# Altium PCB AudioAmplifierBasic.PcbDoc (part 2 of 2)
Units mm, origin at the board's own origin, x right, y up, seen from the top; angles counter-clockwise.
Board outline 125.22 x 154.05 mm, 2 copper layers (Top Layer, Bottom Layer); 45 components, 34 nets, 123 pads, 11 vias.
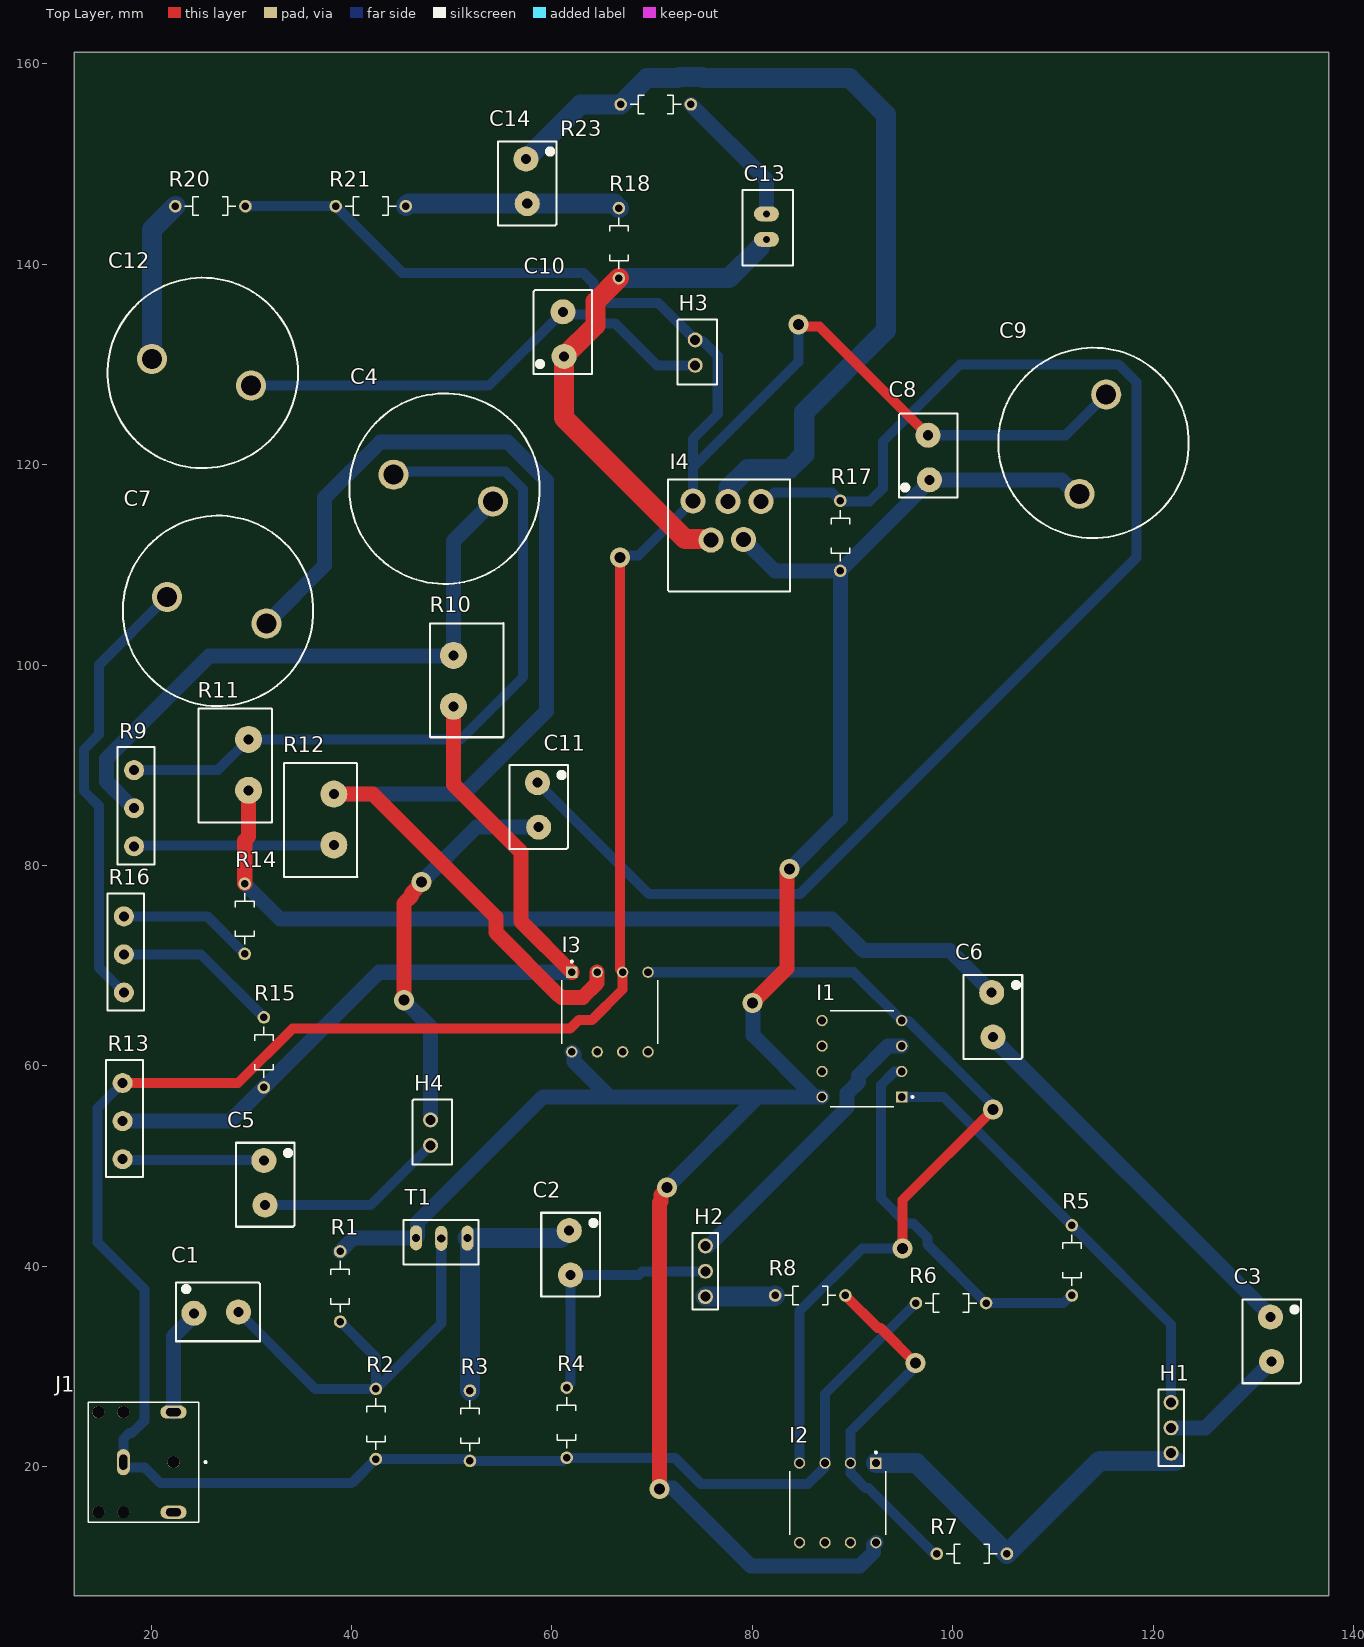
[diagram p0: Top Layer view]

## Part data (continued)
T1: library part SS49E-L, "Hall Effect Sensor, -65mT Min, 1-1.75V, Rectangular, Through Hole Mount", Manufacturer="Honeywell Sensing & Control", Max Operating Temperature=100°C, Max Supply Voltage=6.5V, Min Operating Temperature=-40°C, Min Supply Voltage=2.7V, Operating Current-Max=10mA, Package Shape/Style=Rectangular, Supplier Part Number=71J7825, Body Breadth=1.6mm, Body Height=4.1mm, Body Length or Diameter=4.1mm, Category=Sensors, ComponentLink1Description=https://datasheet.ciiva.com:443/pdfs/VipMasterIC/IC/HWSC/HWSC-S-A0000795678/HWSC-S-A0000795678-1.pdf?src-supplier=IHS+Markit, ComponentLink1URL=https://datasheet.ciiva.com:443/pdfs/VipMasterIC/IC/HWSC/HWSC-S-A0000795678/HWSC-S-A0000795678-1.pdf?src-supplier=IHS+Markit, ComponentLink2Description=https://datasheet.ciiva.com/15703/honeywell-sensing-ss39et-ss49e-ss59et-productsheet-15703324.pdf?src-supplier=Onlinecomponents.com, ComponentLink2URL=https://datasheet.ciiva.com/15703/honeywell-sensing-ss39et-ss49e-ss59et-productsheet-15703324.pdf?src-supplier=Onlinecomponents.com, Housing Material=Plastic, Linearity=-0.7%, Magnetic Field Range-Min=-65mT, Manufacturer Part Number=SS49E-L, Mounting Technology="Through Hole", Output Range=1-1.75V, Output Type="Analog Current", Pricing="1000=5.97 (USD)", RoHS=Yes, RoHS Compliant=Yes, Sensitivity=1.4mV/g, Sensor Type="MAGNETIC FIELD SENSOR,HALL EFFECT", Supplier=Newark, Termination=Solder

## Via types
v1: diameter 2, hole 1.1, Top Layer to Bottom Layer, 11 vias

## Nets (pads, with @x,y where several pads share a name; then routed paths per layer and width w, separated by ;. In a path a pad name is that pad's centre, name@x,y a point inside that pad or via, vN(x,y) a via of type N, cw(c..) or ccw(c..) an arc to the next point about the centre after c; other vN are vias at no path point)
+15: C8.2 C9.1 I1.8 I2.8 I3.8 I4.5 R1.2 R17.2 T1.1 | length 229.5
  Top Layer w1.5: v1(70.739,17.78) 70.739,46.355 70.866,46.482 70.866,47.109 71.501,47.744 v1(71.501,47.879) ; v1(80.01,66.294) 83.439,69.723 83.439,79.375 v1(83.693,79.629)
  Bottom Layer w1.5: R1.2 40.224,42.835 T1.1 46.585,42.985 46.585,44.398 59.082,56.896 65.748,56.896 ; I3.8 62.201,61.177 62.201,60.443 65.748,56.896 ; v1(70.739,17.78) 70.816,17.857 72.059,17.857 79.818,10.098 90.748,10.098 92.104,11.454 92.104,12.188 I2.8 ; v1(71.501,47.879) 80.518,56.896 ; I4.5 82.24,109.403 R17.2 ; v1(80.01,66.294) 80.08,66.224 80.08,63.044 86.228,56.896 I1.8 80.518,56.896 ; v1(83.693,79.629) 88.773,84.709 R17.2 ; C9.1 112.243,117.094 110.846,118.491 C8.2 97.663,118.293 R17.2 ; 65.748,56.896 80.518,56.896
-15: I1.4 I2.4 I3.4 | length 86
  Top Layer w1: v1(94.996,41.783) 94.996,46.609 v1(104.013,55.626)
  Bottom Layer w1: I3.4 90.076,69.342 I1.4 94.927,64.491 95.569,64.491 103.822,56.238 103.822,55.817 v1(104.013,55.626) ; I2.4 84.709,35.523 90.969,41.783 v1(94.996,41.783)
GND: C8.1 C9.2 H3.1 I2.3 I3.3 I4.3 J1.1 R2.1 R3.1 R4.1 R6.1 R13.1 R20.1 R21.1 | length 367
  Top Layer w1: R13.1 28.673,58.283 34.096,63.706 61.8,63.706 62.686,64.592 64.013,64.592 67.031,67.61 67.031,69.317 I3.3 67.056,69.377 66.802,69.631 v1(66.802,110.744) ; v1(84.582,133.985) 84.773,133.794 86.678,133.794 C8.1
  Bottom Layer w1: R13.1 14.645,55.783 14.645,42.388 19.325,37.708 19.325,24.577 18.095,23.347 17.811,23.347 17.225,22.761 J1.1 ; J1.1@17.225,20.035 17.367,19.893 19.379,19.893 20.925,18.347 40.008,18.347 R2.1 51.563,20.757 51.746,20.574 R3.1 61.088,20.574 61.398,20.884 R4.1 72.253,20.884 74.849,18.288 85.564,18.288 87.224,19.948 87.224,20.328 I2.3 87.249,27.249 R6.1 ; R20.1 R21.1 45.054,139.152 63.125,139.152 64.175,138.102 64.175,137.577 65.639,136.113 70.643,136.113 H3.1 74.391,132.365 75.033,132.365 76.545,130.853 76.545,125.052 74.073,122.581 74.073,119.752 ; v1(66.802,110.744) 66.993,110.935 68.635,110.935 I4.3 74.073,119.752 ; v1(84.582,133.985) 84.582,130.261 74.073,119.752 ; C8.1 111.252,122.936 C9.2
NetC1_1: C1.1 R1.1 R2.2 T1.2 | length 42.8
  Bottom Layer w1: C1.1 36.378,27.757 R2.2 ; R1.1 42.418,30.917 R2.2 ; T1.2 48.948,34.287 R2.2
NetC1_2: C1.2 J1.3 | length 10.7
  Bottom Layer w1.5: J1.3 22.225,33.003 24.257,35.035 C1.2
NetC2_1: C2.1 H2.2 R4.2 | length 25
  Bottom Layer w1: R4.2 61.468,27.954 61.849,28.335 C2.1 68.668,39.116 69.049,39.497 H2.2
NetC2_2: C2.2 R3.2 T1.3 | length 25.8
  Bottom Layer w2: R3.2 51.816,42.549 51.566,42.799 T1.3 60.825,42.799 61.587,43.561 C2.2
NetC3_1: C3.1 H1.2 | length 12.9
  Bottom Layer w1.5: H1.2 125.222,23.876 C3.1 C3.1@131.699,30.607
NetC3_2: C3.2 C6.1 | length 39.4
  Bottom Layer w1.5: C6.1 104.013,62.738 131.699,35.052 C3.2
NetC4_1: C4.1 R9.1 R11.2 | length 75.2
  Bottom Layer w1: R9.1 26.65,89.515 R11.2 50.894,92.583 57.102,98.791 57.102,117.575 55.345,119.332 44.529,119.332 C4.1
NetC4_2: C4.2 R9.2 R10.1 | length 62
  Bottom Layer w1.5: R9.2 18.199,85.715 15.538,88.376 15.538,90.654 25.774,100.89 50.09,100.89 R10.1 50.165,112.395 C4.2
NetC5_1: C5.1 H4.2 | length 19
  Bottom Layer w1: C5.1 41.91,46.101 H4.2
NetC5_2: C5.2 R13.3 | length 14.2
  Bottom Layer w1: R13.3 17.213,50.615 31.173,50.615 C5.2
NetC6_2: C6.2 R11.1 R14.1 | length 88.5
  Top Layer w1.5: R14.1 29.337,82.487 29.718,82.868 R11.1
  Bottom Layer w1.5: R14.1 32.837,74.676 87.924,74.676 91.099,71.501 99.695,71.501 C6.2
NetC7_1: C7.1 R16.3 | length 44.6
  Bottom Layer w1: R16.3 14.772,69.82 14.772,85.96 13.288,87.444 13.288,91.586 14.772,93.07 14.772,99.989 C7.1
NetC7_2: C7.2 I3.2 R12.2 | length 125.9
  Top Layer w1.5: R12.2 42.116,87.122 54.408,74.83 54.408,73.306 60.686,67.027 60.755,67.027 60.94,66.842 63.081,66.842 64.516,68.277 I3.2
  Bottom Layer w1.5: C7.2 37.316,109.96 37.316,116.716 42.85,122.249 55.61,122.249 59.436,118.423 59.436,95.377 51.181,87.122 R12.2
NetC10_1: C10.1 C12.2 H3.2 | length 49.6
  Bottom Layer w1: C12.2 53.721,127.889 C10.1 61.374,134.968 63.78,134.968 64.635,134.113 66.301,134.113 70.493,129.921 H3.2
NetC10_2: C10.2 C13.2 I4.4 R18.2 | length 51.3
  Top Layer w2: R18.2 64.337,136.275 64.337,133.909 61.238,130.81 C10.2 61.214,124.637 73.288,112.563 75.768,112.563 I4.4
  Bottom Layer w2: R18.2 77.653,138.613 80.772,141.732
NetC11_1: C11.1 H4.1 | length 39.5
  Top Layer w1.5: v1(45.212,66.548) 45.212,76.2 45.973,76.961 45.973,77.207 46.99,78.224 v1(46.99,78.359)
  Bottom Layer w1.5: v1(45.212,66.548) 47.879,63.881 H4.1 ; v1(46.99,78.359) 52.451,83.82 C11.1
NetC11_2: C11.2 I4.1 R17.1 | length 143.1
  Bottom Layer w1: C11.2 69.683,77.129 84.729,77.129 118.316,110.716 118.316,128.243 116.559,130 100.711,130 93.026,122.315 93.026,117.645 91.702,116.321 R17.1@88.773,116.321 ; I4.1 81.258,116.321 82.158,117.221 87.955,117.221 R17.1
NetC12_1: C12.1 R20.2 | length 16.2
  Bottom Layer w2: C12.1 20.066,143.454 R20.2
NetC13_1: C13.1 R23.2 | length 14
  Bottom Layer w1.5: R23.2 81.407,148.407 C13.1
NetC14_1: C14.1 R18.1 R21.2 | length 21.6
  Bottom Layer w2: R21.2 45.664,146.05 C14.1 66.238,146.05 R18.1
NetC14_2: C14.2 I4.2 R23.1 | length 88.5
  Bottom Layer w2: C14.2 62.865,155.956 R23.1 69.487,158.585 72.598,158.585 72.719,158.706 74.997,158.706 75.118,158.585 89.7,158.585 93.345,154.94 93.345,133.411 85.177,125.243 85.177,121.036 83.713,119.571 79.506,119.571 77.602,117.667 77.602,116.353 I4.2
NetH1_1: H1.1 I1.1 R5.2 | length 44.1
  Bottom Layer w1: I1.1 99.075,56.896 R5.2 121.793,34.178 H1.1
NetH1_3: H1.3 I2.1 R7.2 | length 37.4
  Bottom Layer w2: I2.1 96.36,20.353 R7.2 114.681,20.574 122.174,20.574
NetH2_1: H2.1 I1.3 | length 29
  Bottom Layer w1.5: H2.1 75.639,42.037 89.462,55.86 89.462,57.27 90.587,58.395 90.587,59.014 93.549,61.976 I1.3
NetH2_3: H2.3 R8.2 | length 7
  Bottom Layer w2: H2.3 82.154,36.957 R8.2
NetI1_2: I1.2 R5.1 R6.2 | length 38
  Bottom Layer w1: I1.2 94.877,59.411 94.166,59.411 92.837,58.082 92.837,46.807 95.361,44.283 96.032,44.283 97.496,42.819 97.496,42.148 R6.2 111.055,36.322 111.817,37.084 R5.1
NetI2_2: I2.2 R7.1 R8.1 | length 35.4
  Top Layer w1: R8.1 92.508,33.857 92.762,33.857 v1(96.266,30.353)
  Bottom Layer w1: v1(96.266,30.353) 96.266,29.972 89.789,23.495 I2.2 89.814,20.328 89.814,19.333 91.293,17.853 91.578,17.853 98.078,11.352 98.361,11.352 R7.1
NetI3_1: I3.1 R10.2 R13.2 R15.2 | length 82.4
  Top Layer w1.5: R10.2 50.165,88.086 56.908,81.344 56.908,74.41 I3.1
  Bottom Layer w1.5: R13.2 27.884,54.483 R15.2 42.743,69.342 I3.1
NetR9_3: R9.3 R12.1 | length 20
  Bottom Layer w1: R9.3 18.351,81.978 38.163,81.978 R12.1
NetR14_2: R14.2 R16.1 | length 13.6
  Bottom Layer w1: R16.1 25.593,74.92 R14.2
NetR15_1: R15.1 R16.2 | length 16.6
  Bottom Layer w1: R16.2 24.963,71.12 R15.1
pads on no net: I1.5 I1.6 I1.7 I2.5 I2.6 I2.7 I3.5 I3.6 I3.7 J1. J1.2

## Text inside footprints (layer, text, board x,y; h text height)
J1: Mechanical 13 "PCB EDGE" at 13.975,13.447 h0.81 r270